# Altium PCB PDB_PCB.PcbDoc (part 1 of 2)
Units mil, origin at the board's own origin, x right, y up, seen from the top; angles counter-clockwise.
Board outline 5500 x 4505 mil, 2 copper layers (Top Layer, Bottom Layer); 322 components, 128 nets, 931 pads, 46 vias.
Unrouted connection lines stored in the file: 604.
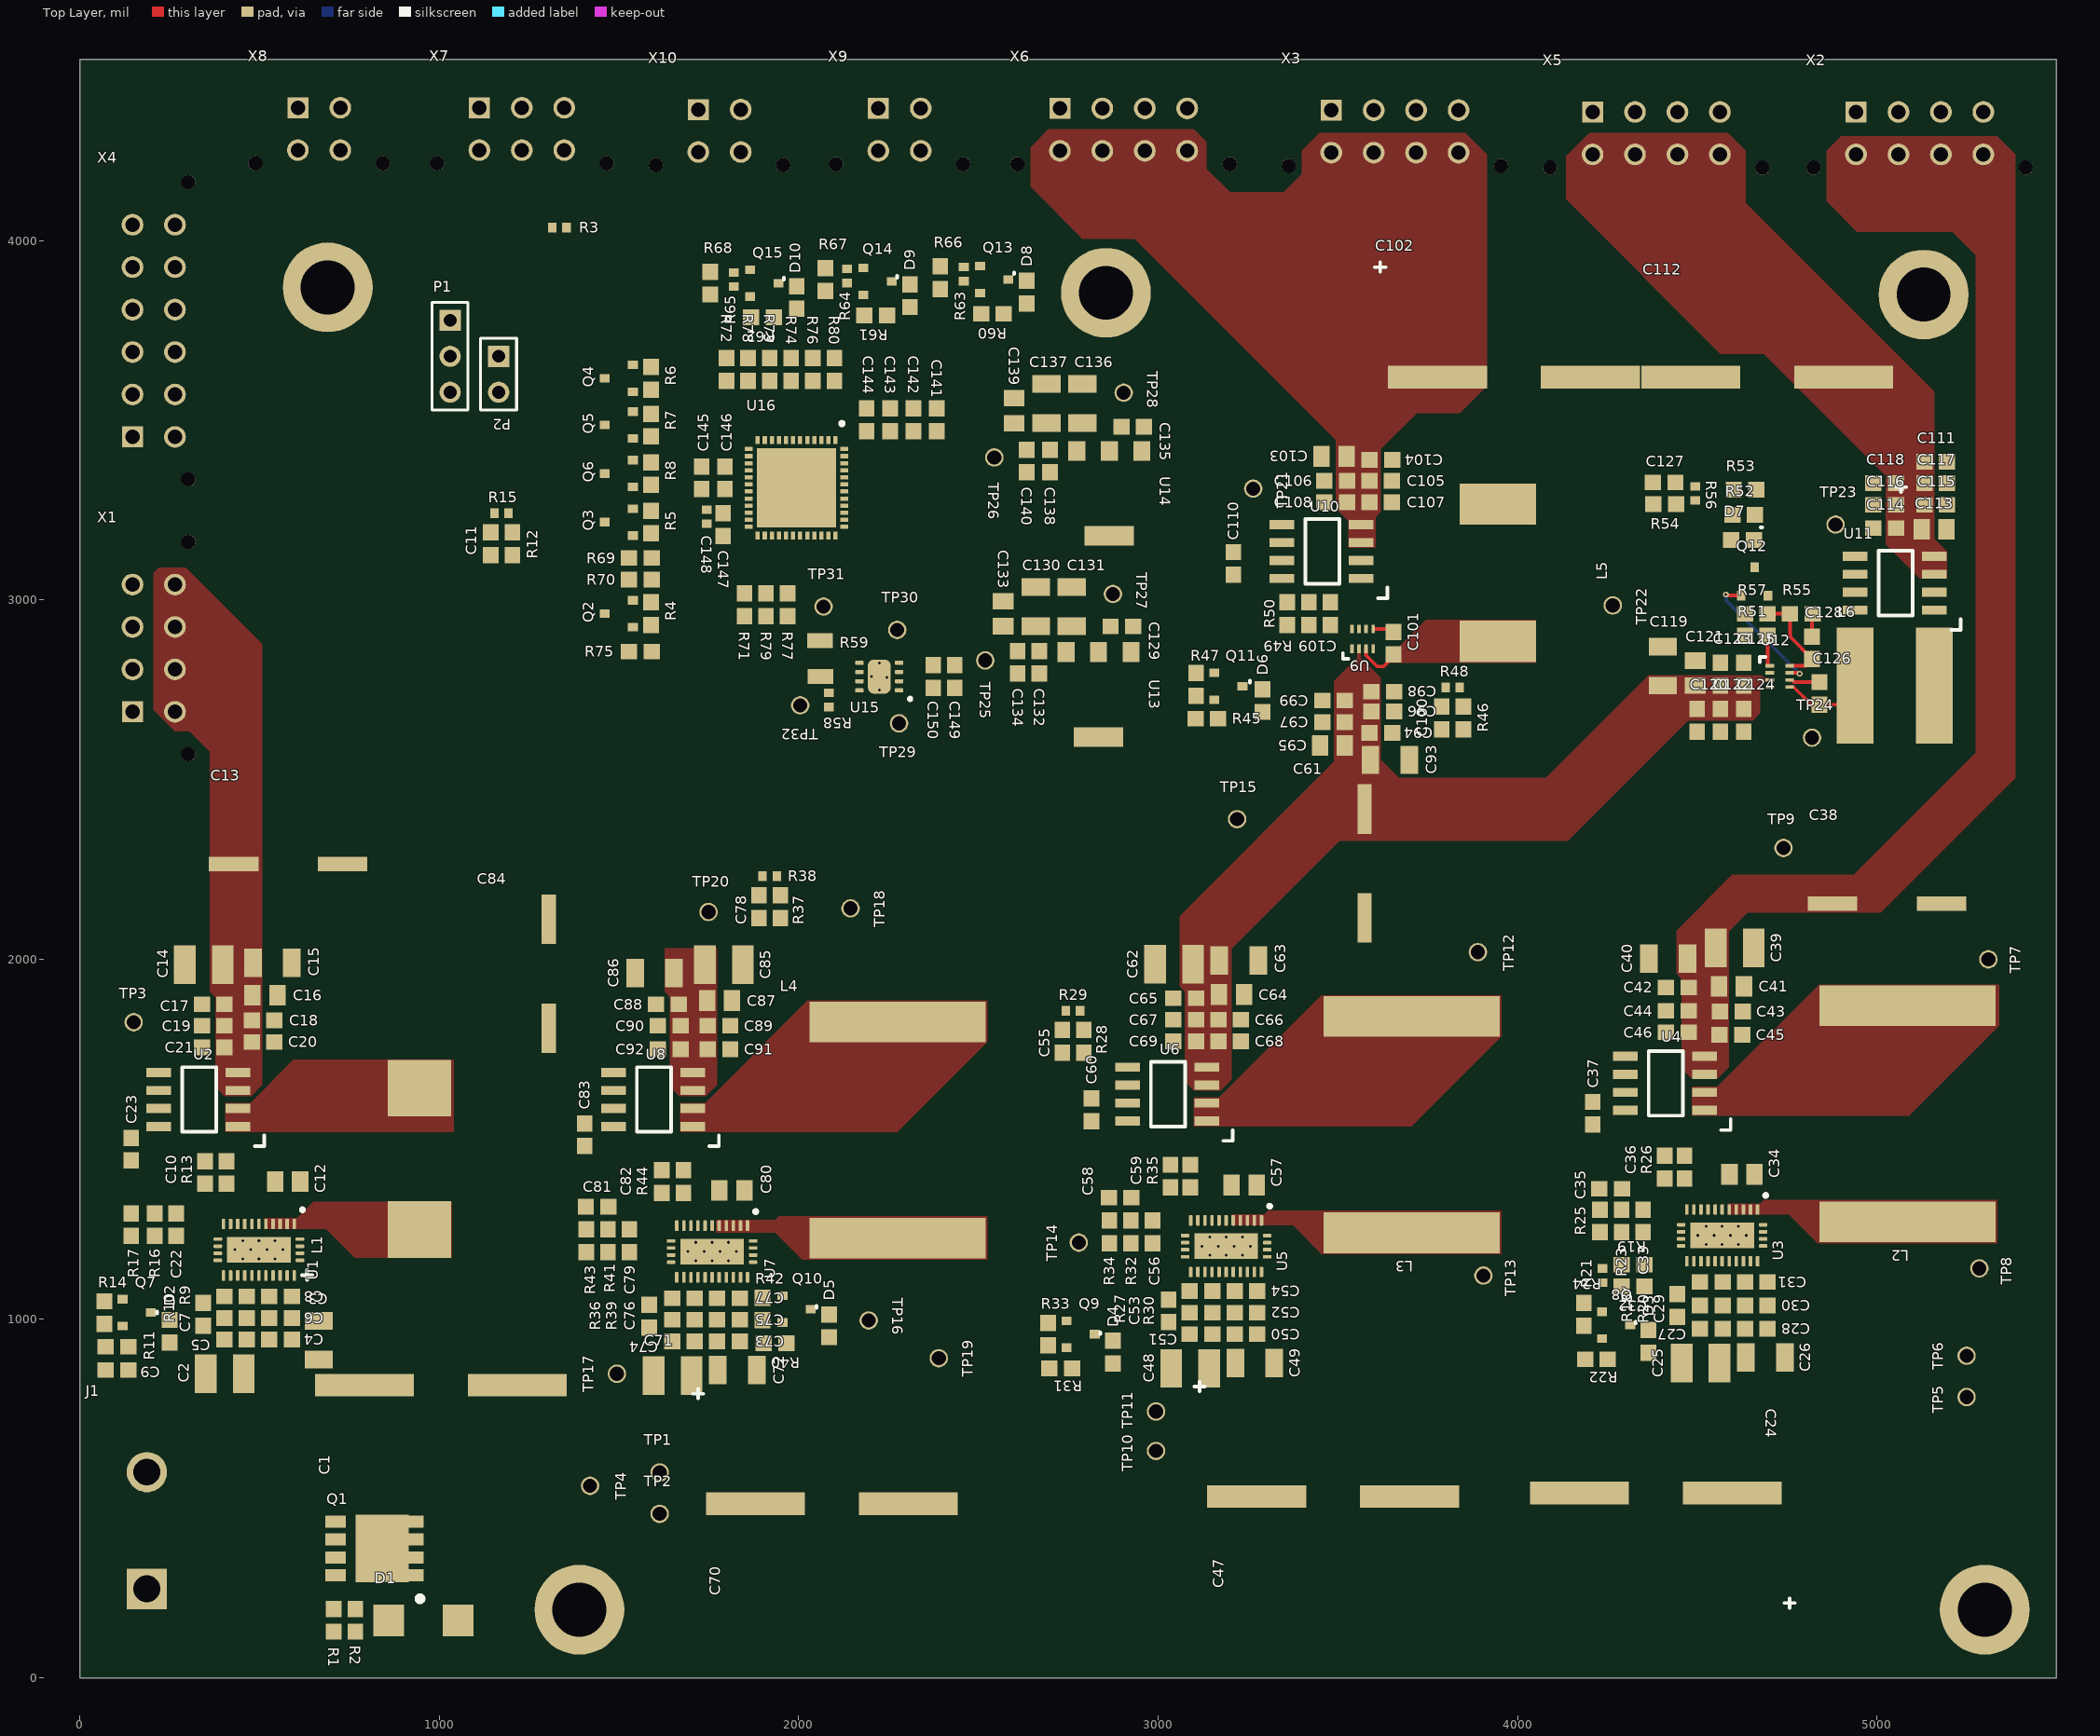
[diagram p0: Top Layer view]
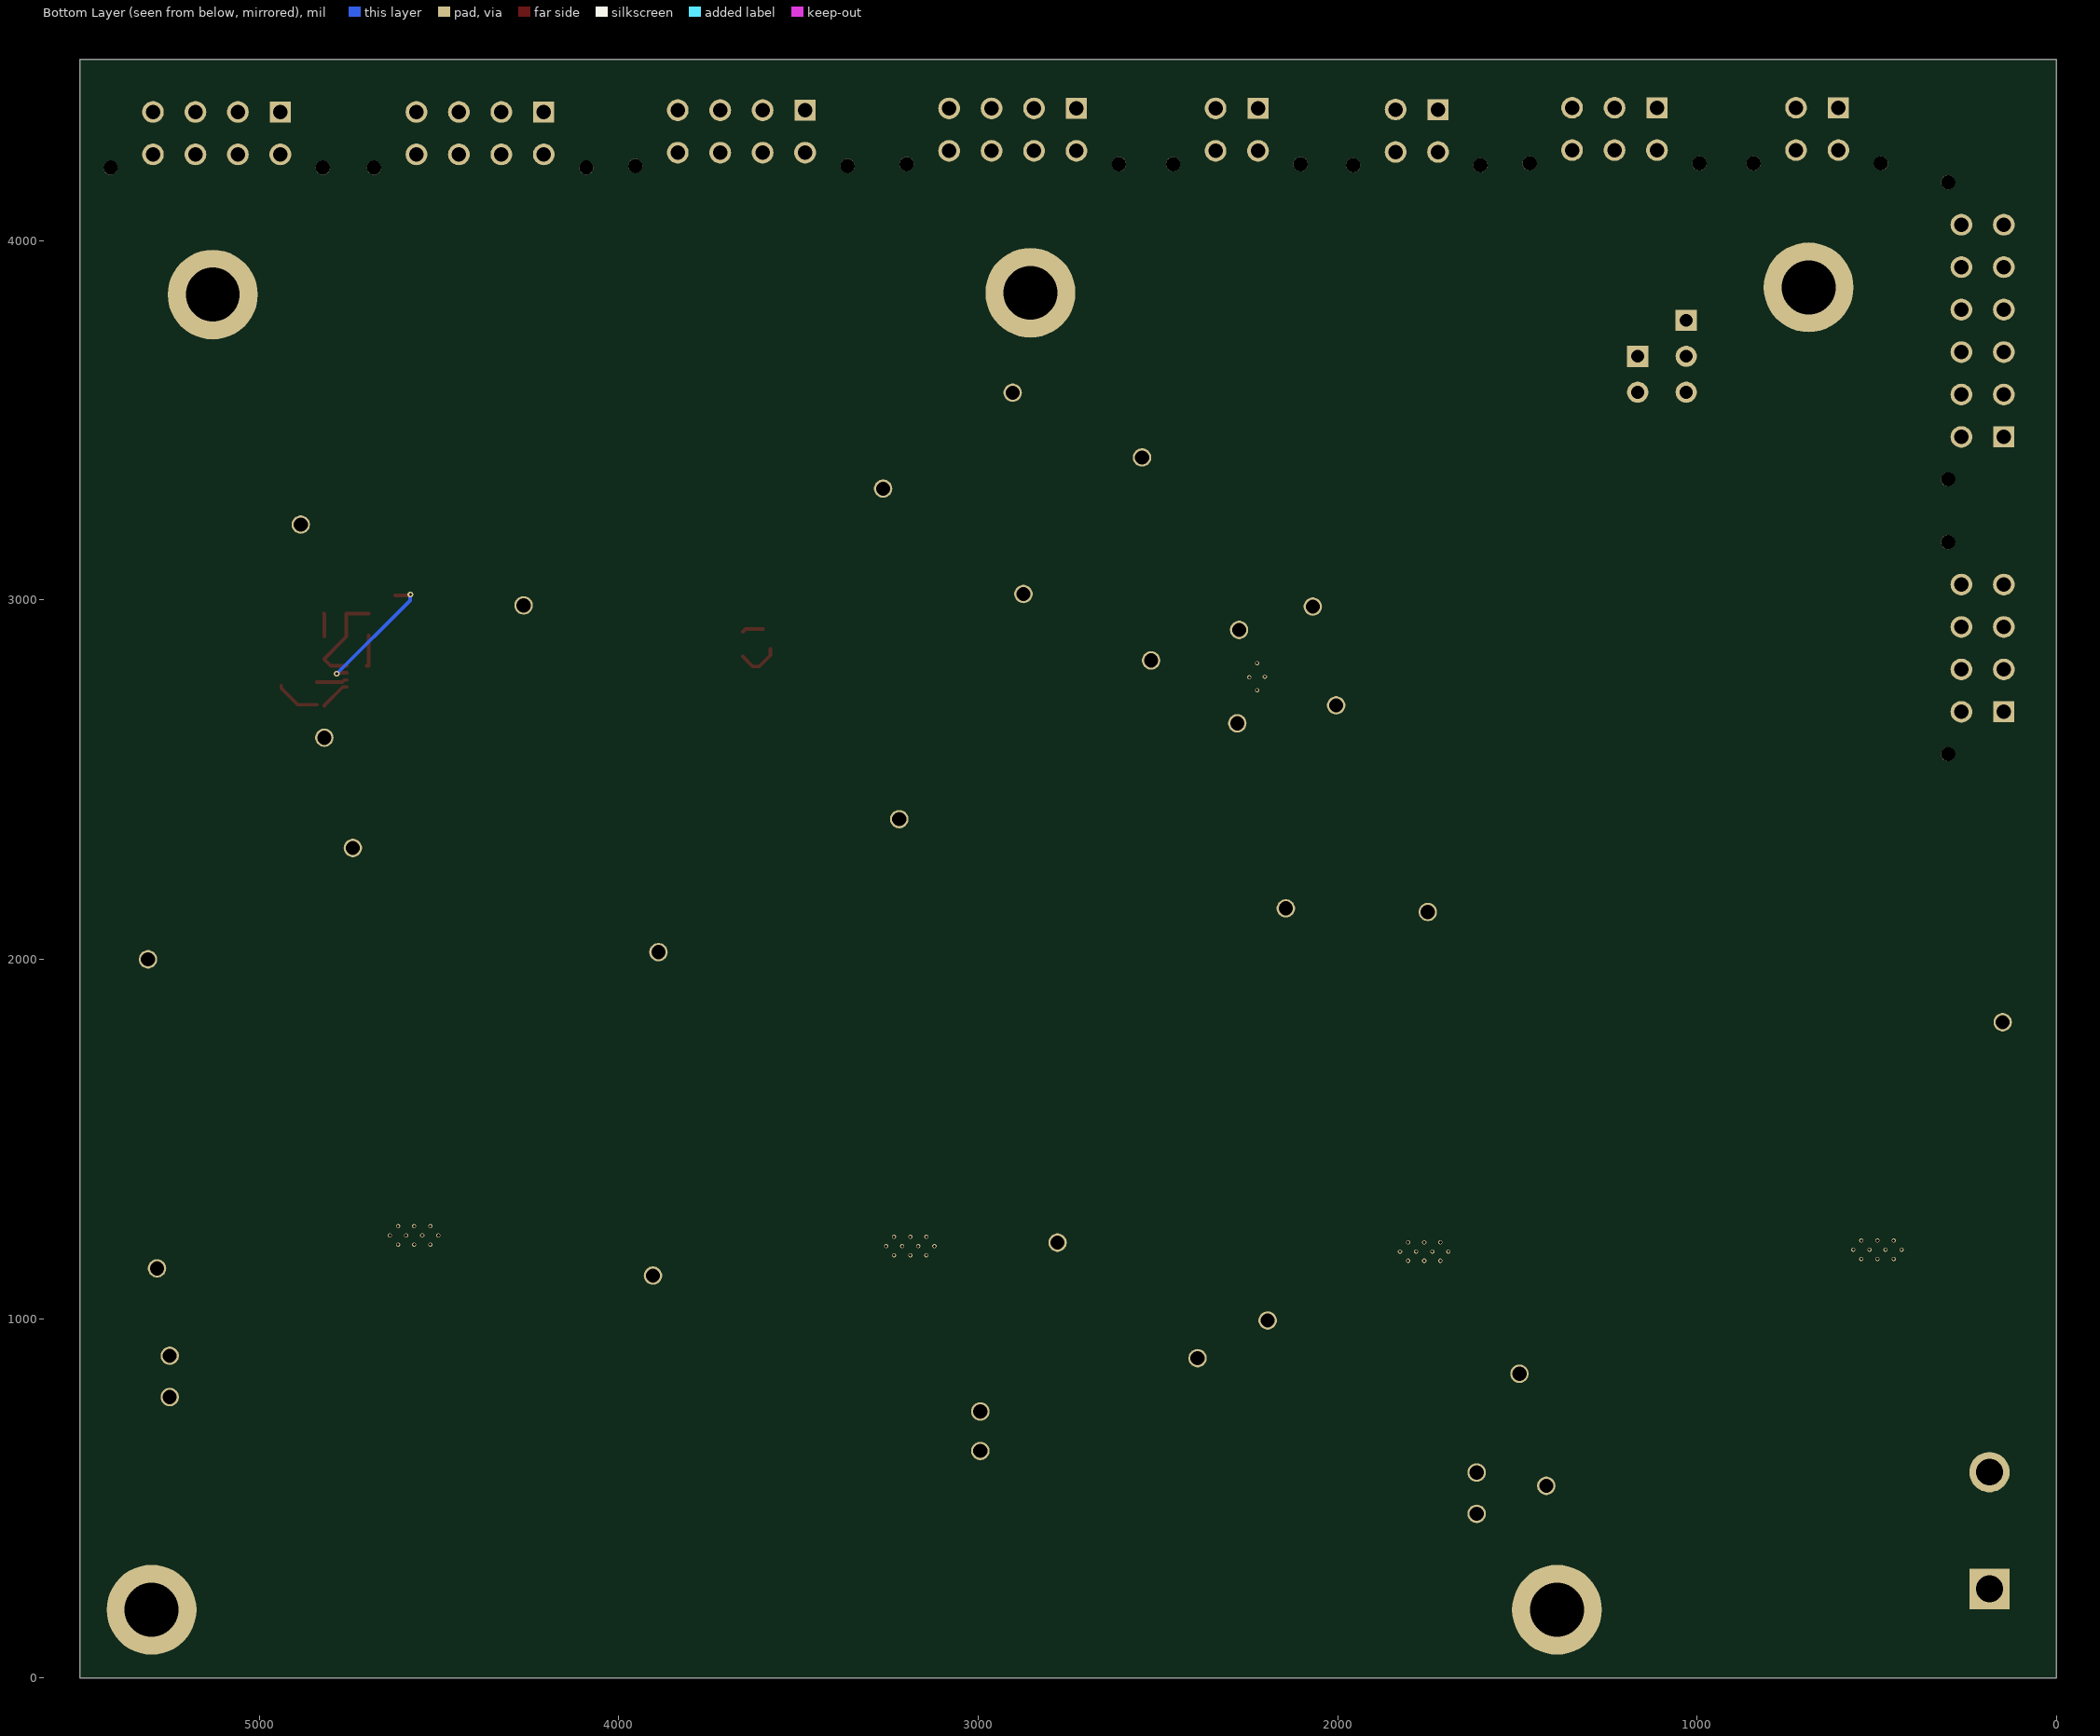
[diagram p1: Bottom Layer view, seen from below]

## Layer stack, top to bottom
Top Solder: solder mask 0.4, Solder Resist, Dk 3.5
Top Layer: signal copper 1.4
Dielectric 1: dielectric 12.6, FR-4, Dk 4.8
Bottom Layer: signal copper 1.4
Bottom Solder: solder mask 0.4, Solder Resist, Dk 3.5

## Board outline
0,0 5500,0 5500,4505 0,4505

## Design rules (kind name [scope] priority, off if disabled: settings)
BoardOutlineClearance [All] p1: gap=7.87 ignorepadtopadclearanceinfootprint=FALSE
Clearance [All] p1: gap=4 ignorepadtopadclearanceinfootprint=FALSE except(5: Arc-Via Track-Via SMDPad-Via THPad-Via Via-Via Via-Fill Via-Poly Via-Region Via-Text; 9.84: Arc-Hole Track-Hole SMDPad-Hole THPad-Hole Via-Hole Fill-Hole Poly-Hole Region-Hole Text-Hole)
ComponentClearance [All] p1: gap=4 collisioncheckmode=3 verticalgap=4 showdistances=TRUE
DiffPairsRouting [All] p1: maxlimit=4 minlimit=4 mostfreqgap=4 toplayer_minwidth=4 toplayer_maxwidth=71497.94 toplayer_prefwidth=4 bottomlayer_minwidth=4 bottomlayer_maxwidth=71497.94 bottomlayer_prefwidth=4 maxuncoupledlength=500
Height [All] p1: minheight=0 maxheight=71497.94 prefheight=500
HoleSize [All] p1: absolutevalues=TRUE maxlimit=248.03 minlimit=7.87 maxpercent=80.000 minpercent=20.000
HoleToHoleClearance [All] p1: gap=9.84 allowstackedmicrovias=FALSE
MinimumAnnularRing [All] p1: minimumring=3
MinimumSolderMaskSliver [All] p1: minsoldermaskwidth=0
PlaneClearance [All] p1: clearance=4
PlaneConnect PlaneConnectPowerPads [InPadClass('PowerPads')] p1: planeconnectstyle=Direct reliefexpansion=20 reliefentries=4 reliefconductorwidth=10 reliefairgap=10
PlaneConnect [All] p2: pad.planeconnectstyle=Relief pad.reliefexpansion=11.81 pad.reliefentries=4 pad.reliefconductorwidth=4 pad.reliefairgap=4 via.planeconnectstyle=Direct via.reliefexpansion=11.81 via.reliefentries=4 via.reliefconductorwidth=5 via.reliefairgap=5
PolygonConnect PolygonConnectPowerPads [All vs (InPadClass('PowerPads'))] p1: connectstyle=Direct reliefconductorwidth=10 reliefentries=4 polygonreliefangle="90 Angle" airgapwidth=10
PolygonConnect [All] p2: connectstyle=Direct reliefconductorwidth=4 reliefentries=4 polygonreliefangle="90 Angle" airgapwidth=4
RoutingVias [All] p1: holewidth=7.87 width=17.72 viastyle="Through Hole" minholewidth=7.87 minwidth=17.72 maxholewidth=248.03 maxwidth=257.87
SilkToSilkClearance [All] p1: silktosilkclearance=0
SilkToSolderMaskClearance [IsPad] p1: minsilkscreentomaskgap=4 clearancetoexposedcopper=TRUE
SolderMaskExpansion [All] p1: expansion=2.95 istentingtop=FALSE
Width [All] p1: maxlimit=71497.94 minlimit=4 preferedwidth=4
20 further rules are at their usual default settings.

## Classes and differential pairs
component class Connectors: D1 J1 Q1 Q2 Q3 Q4 Q5 Q6 R1 R2 R3 R4 R5 R6 R7 R8 X1 X2 X3 X4 X5 X6 X7 X8
component class can-stm32g4: C141 C142 C143 C144 C145 C146 C147 C148 C149 C150 D8 D9 D10 P1 P2 P? Q13 Q14 Q15 R58 R59 R60 R61 R62 R63 R64 R65 R66 R67 R68 R69 R70 R71 R72 R73 R74 R75 R76 R77 R78 R79 R80 TP29 TP30 TP31 TP32 U15 U16 X9 X10
component class 24V_Main: C1 C2 C3 C4 C5 C6 C7 C8 C9 C10 C11 C12 C13 C14 C15 C16 C17 C18 C19 C20 C21 C22 C23 D2 L1 Q7 R9 R10 R11 R12 R13 R14 R15 R16 R17 TP1 TP2 TP3 TP4 U1 U2
component class 12V_Rest: C70 C71 C72 C73 C74 C75 C76 C77 C78 C79 C80 C81 C82 C83 C84 C85 C86 C87 C88 C89 C90 C91 C92 D5 L4 Q10 R36 R37 R38 R39 R40 R41 R42 R43 R44 TP16 TP17 TP18 TP19 TP20 U7 U8
component class 12V_Jetson: C24 C25 C26 C27 C28 C29 C30 C31 C32 C33 C34 C35 C36 C37 C38 C39 C40 C41 C42 C43 C44 C45 C46 D3 L2 Q8 R18 R19 R20 R21 R22 R23 R24 R25 R26 TP5 TP6 TP7 TP8 TP9 U3 U4
component class 12V_For_Bucks: C47 C48 C49 C50 C51 C52 C53 C54 C55 C56 C57 C58 C59 C60 C61 C62 C63 C64 C65 C66 C67 C68 C69 D4 L3 Q9 R27 R28 R29 R30 R31 R32 R33 R34 R35 TP10 TP11 TP12 TP13 TP14 TP15 U5 U6
component class 5V_Main: C93 C94 C95 C96 C97 C98 C99 C100 C101 C103 C104 C105 C106 C107 C108 C109 C110 D6 L5 Q11 R45 R46 R47 R48 R49 R50 TP21 TP22 U9 U10
component class 5V-and-3V3-ldo: C129 C130 C131 C132 C133 C134 C135 C136 C137 C138 C139 C140 TP25 TP26 TP27 TP28 U13 U14
component class 3v3_Main: C111 C112 C113 C114 C115 C116 C117 C118 C119 C120 C121 C122 C123 C124 C125 C126 C127 C128 D7 L6 Q12 R51 R52 R53 R54 R55 R56 R57 TP23 TP24 U11 U12
differential pair CAN: +CAN_P -CAN_N

## Components (designator, comment, footprint, x,y, rotation, side; value= is the part's Value field where it differs from the comment)
C1 "100SEV100M12.5X16" ELEC-100U-0001 1005,815 r90 top
C2 "C3225X7R1N106K250AC" CAP-1210 403.47,846.81 r180 top
C3 "CL31B105KCHNNNE" "CAP-1206 - duplicate" 665,935 r90 top
C4 "CC0603KRX7R0BB104" CAP-0603 558.47,941.81 r0 top
C5 "C1608C0G2A103J080AC" CAP-0603 433.47,941.81 r180 top
C6 "C0603Y102K1RAC7867" CAP-0603 558.47,1001.81 r0 top
C7 "0603N101J101CT" CAP-0603 433.47,1001.81 r180 top
C8 "0603N100J500CT" CAP-0603 558.47,1061.81 r0 top
C9 "UMK107BBJ225KA-T" CAP-0603 103.47,856.81 r0 top
C10 "CC0603KRX7R9BB333" CAP-0603 348.47,1406.81 r90 top
C11 "CC0603KRX7R0BB104" CAP-0603 1143.47,3156.81 r90 top
C12 "KAM21KR72A474KL" CAP-0805 578.47,1381.81 r180 top
C13 "50TZV220M10X10.5" ELEC-220U-0003 580,2265 r270 top
C14 "C3225X7R1N106K250AC" CAP-1210 345,1985 r180 top
C15 "CL31B105KCHNNNE" "CAP-1206 - duplicate" 530.87,1990 r0 top
C16 "KAM21KR72A474KL" CAP-0805 515.35,1900 r0 top
C17 "CC0603KRX7R0BB104" CAP-0603 371.5,1875 r180 top
C18 "C1608C0G2A103J080AC" CAP-0603 510.35,1830 r0 top
C19 "C0603Y102K1RAC7867" CAP-0603 371.5,1815 r180 top
C20 "0603N101J101CT" CAP-0603 510.35,1770 r0 top
C21 "0603N100J500CT" CAP-0603 371.5,1755 r180 top
C22 "885012006087" CAP-0603 268.47,1261.81 r270 top
C23 "CC0603KRX7R0BB104" CAP-0603 143.47,1471.81 r270 top
C24 "100SEV100M12.5X16" ELEC-100U-0001 4385,515 r270 top
C25 "C3225X7R1N106K250AC" CAP-1210 4509.47,876.81 r180 top
C26 "CL31B105KCHNNNE" "CAP-1206 - duplicate" 4684.47,891.81 r0 top
C27 "CC0603KRX7R0BB104" CAP-0603 4539.47,971.81 r180 top
C28 "C1608C0G2A103J080AC" CAP-0603 4664.47,971.81 r0 top
C29 "C0603Y102K1RAC7867" CAP-0603 4539.47,1036.81 r180 top
C30 "0603N101J101CT" CAP-0603 4664.47,1036.81 r0 top
C31 "0603N100J500CT" CAP-0603 4664.47,1101.81 r0 top
C32 "CC0603KRX7R0BB104" CAP-0603 4321.5,1090 r180 top
C33 "885012006087" CAP-0603 4349.47,1271.81 r270 top
C34 "KAM21KR72A474KL" CAP-0805 4624.47,1401.81 r180 top
C35 "UMK107AB7105KA-T" CAP-0603 4259.47,1361.81 r180 top
C36 "CC0603KRX7R9BB333" CAP-0603 4409.47,1421.81 r90 top
C37 "CC0603KRX7R0BB104" CAP-0603 4209.47,1571.81 r90 top
C38 "50TZV220M10X10.5" ELEC-220U-0003 5028.43,2155 r270 top
C39 "C3225X7R1N106K250AC" CAP-1210 4604.47,2031.81 r0 top
C40 "CL31B105KCHNNNE" "CAP-1206 - duplicate" 4424.47,2001.81 r180 top
C41 "KAM21KR72A474KL" CAP-0805 4595.35,1925 r0 top
C42 "CC0603KRX7R0BB104" CAP-0603 4444.47,1921.81 r180 top
C43 "C1608C0G2A103J080AC" CAP-0603 4595,1855 r0 top
C44 "C0603Y102K1RAC7867" CAP-0603 4444.47,1856.81 r180 top
C45 "0603N101J101CT" CAP-0603 4593.5,1790 r0 top
C46 "0603N100J500CT" CAP-0603 4444.47,1796.81 r180 top
C47 "100SEV100M12.5X16" ELEC-100U-0001 3487.4,505 r90 top
C48 "C3225X7R1N106K250AC" CAP-1210 3089.47,861.81 r180 top
C49 "CL31B105KCHNNNE" "CAP-1206 - duplicate" 3264.47,876.81 r0 top
C50 "CC0603KRX7R0BB104" CAP-0603 3244.47,956.81 r0 top
C51 "C1608C0G2A103J080AC" CAP-0603 3119.47,956.81 r180 top
C52 "C0603Y102K1RAC7867" CAP-0603 3244.47,1016.81 r0 top
C53 "0603N101J101CT" CAP-0603 3119.47,1016.81 r180 top
C54 "0603N100J500CT" CAP-0603 3244.47,1076.81 r0 top
C55 "CC0603KRX7R0BB104" CAP-0603 2733.48,1771.81 r90 top
C56 "885012006087" CAP-0603 2984.47,1241.81 r270 top
C57 "KAM21KR72A474KL" CAP-0805 3239.47,1371.81 r180 top
C58 "UMK107AB7105KA-T" CAP-0603 2894.47,1336.81 r180 top
C59 "CC0603KRX7R9BB333" CAP-0603 3034.47,1396.81 r90 top
C60 "CC0603KRX7R0BB104" CAP-0603 2815,1581.5 r90 top
C61 "50TZV220M10X10.5" ELEC-220U-0003 3575,2266.57 r180 top
C62 "C3225X7R1N106K250AC" CAP-1210 3044.47,1986.81 r180 top
C63 "CL31B105KCHNNNE" "CAP-1206 - duplicate" 3219.47,1996.81 r0 top
C64 "KAM21KR72A474KL" CAP-0805 3204.47,1901.81 r0 top
C65 "CC0603KRX7R0BB104" CAP-0603 3074.47,1891.81 r180 top
C66 "C1608C0G2A103J080AC" CAP-0603 3199.47,1831.81 r0 top
C67 "C0603Y102K1RAC7867" CAP-0603 3074.47,1831.81 r180 top
C68 "0603N101J101CT" CAP-0603 3199.47,1771.81 r0 top
C69 "0603N100J500CT" CAP-0603 3074.47,1771.81 r180 top
C70 "100SEV100M12.5X16" ELEC-100U-0001 2092.6,485 r90 top
C71 "C3225X7R1N106K250AC" CAP-1210 1649.47,841.81 r180 top
C72 "CL31B105KCHNNNE" "CAP-1206 - duplicate" 1824.47,856.81 r0 top
C73 "CC0603KRX7R0BB104" CAP-0603 1804.47,936.81 r0 top
C74 "C1608C0G2A103J080AC" CAP-0603 1679.47,936.81 r180 top
C75 "C0603Y102K1RAC7867" CAP-0603 1804.47,996.81 r0 top
C76 "0603N101J101CT" CAP-0603 1679.47,996.81 r180 top
C77 "0603N100J500CT" CAP-0603 1804.47,1056.81 r0 top
C78 "CC0603KRX7R0BB104" CAP-0603 1889.47,2146.81 r90 top
C79 "885012006087" CAP-0603 1529.47,1216.81 r270 top
C80 "KAM21KR72A474KL" CAP-0805 1814.47,1356.81 r180 top
C81 "UMK107AB7105KA-T" CAP-0603 1439.47,1311.81 r180 top
C82 "CC0603KRX7R9BB333" CAP-0603 1619.47,1381.81 r90 top
C83 "CC0603KRX7R0BB104" CAP-0603 1404.47,1511.81 r90 top
C84 "50TZV220M10X10.5" ELEC-220U-0003 1305,1960 r180 top
C85 "C3225X7R1N106K250AC" CAP-1210 1792.2,1985 r0 top
C86 "CL31B105KCHNNNE" "CAP-1206 - duplicate" 1604.47,1961.81 r180 top
C87 "KAM21KR72A474KL" CAP-0805 1780.35,1885 r0 top
C88 "CC0603KRX7R0BB104" CAP-0603 1635,1875 r180 top
C89 "C1608C0G2A103J080AC" CAP-0603 1778.5,1815 r0 top
C90 "C0603Y102K1RAC7867" CAP-0603 1640,1815 r180 top
C91 "0603N101J101CT" CAP-0603 1778.5,1750 r0 top
C92 "0603N100J500CT" CAP-0603 1640,1750 r180 top
C93 "CL31B106KBHNNNE" CAP-1206 3645,2555 r0 top
C94 "UMK107AB7105KA-T" CAP-0603 3620,2630 r0 top
C95 "KAM21KR72A474KL" CAP-0805 3485,2595 r180 top
C96 "C1608C0G2A103J080AC" CAP-0603 3625,2690 r0 top
C97 "CC0603KRX7R0BB104" CAP-0603 3488.5,2660 r180 top
C98 "C0603Y102K1RAC7867" CAP-0603 3625,2745 r0 top
C99 "0603N101J101CT" CAP-0603 3488.5,2720 r180 top
C100 "CC0603KRX7R0BB104" CAP-0603 3789.47,2671.81 r90 top
C101 "CC0603KRX7R0BB104" CAP-0603 3655,2880 r270 top
C102 "100SEV100M12.5X16" ELEC-100U-0001 3990,3620 r90 top
C103 "KAM21KR72A474KL" CAP-0805 3489.65,3400 r180 top
C104 "C0603Y102K1RAC7867" CAP-0603 3620,3390 r0 top
C105 "C1608C0G2A103J080AC" CAP-0603 3619.47,3331.81 r0 top
C106 "CC0603KRX7R0BB104" CAP-0603 3494.47,3331.81 r180 top
C107 "0603N101J101CT" CAP-0603 3619.47,3271.81 r0 top
C108 "7447798111" CAP-0603 3494.47,3271.81 r180 top
C109 "7447798111" CAP-0603 3479.47,2961.81 r90 top
C110 "CC0603KRX7R0BB104" CAP-0603 3209.47,3101.81 r90 top
C111 "CC0603KRX7R0BB104" CAP-0603 5163.5,3385 r180 top
C112 "100SEV100M12.5X16" ELEC-100U-0001 4695,3620 r270 top
C113 "KAM21KR72A474KL" CAP-0805 5159.12,3196.81 r0 top
C114 "C0603Y102K1RAC7867" CAP-0603 5021.5,3200 r180 top
C115 "C1608C0G2A103J080AC" CAP-0603 5163.5,3265 r0 top
C116 "CC0603KRX7R0BB104" CAP-0603 5021.5,3265 r180 top
C117 "0603N101J101CT" CAP-0603 5163.5,3325 r0 top
C118 "7447798111" CAP-0603 5021.5,3325 r180 top
C119 "CL31B106KBHNNNE" CAP-1206 4404.47,2815.94 r90 top
C120 "UMK107AB7105KA-T" CAP-0603 4499.47,2665.31 r270 top
C121 "KAM21KR72A474KL" CAP-0805 4494.47,2796.46 r90 top
C122 "C1608C0G2A103J080AC" CAP-0603 4564.47,2665.31 r270 top
C123 "CC0603KRX7R0BB104" CAP-0603 4564.47,2793.31 r90 top
C124 "C0603Y102K1RAC7867" CAP-0603 4629.47,2665.31 r270 top
C125 "0603N101J101CT" CAP-0603 4629.47,2793.31 r90 top
C126 "CC0603KRX7R0BB104" CAP-0603 4840,2740 r270 top
C127 "CC0603KRX7R0BB104" CAP-0603 4407.98,3326.81 r0 top
C128 "7447798111" CAP-0603 4819.47,2866.81 r270 top
C129 "CGA3E3X7R1H334K080AB" CAP-0603 2899.47,2926.81 r180 top
C130 "CL31B106KBHNNNE" CAP-1206 2659.47,2981.81 r90 top
C131 "CL31B106KBHNNNE" CAP-1206 2759.47,2981.81 r90 top
C132 "UMK107AB7105KA-T" CAP-0603 2669.47,2826.81 r270 top
C133 "KAM21KR72A474KL" CAP-0805 2569.47,2961.81 r270 top
C134 "CC0603KRX7R0BB104" CAP-0603 2609.47,2826.81 r270 top
C135 "CGA3E3X7R1H334K080AB" CAP-0603 2929.47,3481.81 r180 top
C136 "CL31B106KBHNNNE" CAP-1206 2789.47,3546.81 r90 top
C137 "CL31B106KBHNNNE" CAP-1206 2689.47,3546.81 r90 top
C138 "UMK107AB7105KA-T" CAP-0603 2699.47,3386.81 r270 top
C139 "KAM21KR72A474KL" CAP-0805 2599.47,3526.81 r270 top
C140 "CC0603KRX7R0BB104" CAP-0603 2634.47,3386.81 r270 top
C141 "TMK107BBJ475KA-T" CAP-0603 2384.47,3501.81 r90 top
C142 "CC0603KRX7R0BB104" CAP-0603 2319.47,3501.81 r90 top
C143 "CC0603KRX7R0BB104" CAP-0603 2254.47,3501.81 r90 top
C144 "CC0603KRX7R0BB104" CAP-0603 2189.47,3501.81 r90 top
C145 "UMK107AB7105KA-T" CAP-0603 1730,3340 r90 top
C146 "CC0603KRX7R0BB104" CAP-0603 1795,3340 r90 top
C147 "UMK107AB7105KA-T" CAP-0603 1790,3210 r270 top
C148 "CC0402KRX7R0BB103" CAP-0402 1744.47,3231.81 r270 top
C149 "TMK107BBJ475KA-T" CAP-0603 2434.47,2786.81 r270 top
C150 "CC0603KRX7R0BB104" CAP-0603 2374.47,2786.81 r270 top
D1 "SMBJE43CAH" "DO-214AA (SMBJ)" 955,160 r0 top
D2 "150060AS75000" LED-0603 250,965 r90 top
D3 "150060AS75000" LED-0603 4364.47,936.81 r90 top
D4 "150060AS75000" LED-0603 2874.47,906.81 r90 top
D5 "150060AS75000" LED-0603 2085,980 r90 top
D6 "150060AS75000" LED-0603 3290.63,2720 r90 top
D7 "150060AS75000" LED-0603 4625.97,3166.81 r0 top
D8 "150060AS75000" LED-0603 2634.47,3856.81 r90 top
D9 "150060AS75000" LED-0603 2309.47,3846.81 r90 top
D10 "150060AS75000" LED-0603 1994.47,3841.81 r90 top
J1 "1546927-2" CONN-1546927-2 186.81,410.53 r180 top
L1 "SRP1270-100M" PWRIND-10U-0002 945,1445 r90 top
L2 "IHLP6767GZER8R2M01" PWRIND-8.2U-0002 5085,1570 r90 top
L3 "IHLP6767GZER8R2M01" PWRIND-8.2U-0002 3705,1540 r90 top
L4 "IHLP6767GZER8R2M01" PWRIND-8.2U-0002 2275,1525 r90 top
L5 "SRR1240-3R3Y" PWRIND-3.3U-0003 3945,3075.94 r90 top
L6 "SRN8040-1R0Y" PWRIND-6.8U-0001 5049.47,2761.81 r0 top
P1 "Header 3" HDR1X3 1030.53,3778.19 r270 top
P2 "Header 2" HDR1X2 1165.53,3678.19 r270 top
Q1 "TPH7R006PL,L1Q" NMOS-8PowerVDFN 931.81,285.53 r90 top
Q2 "T2N7002AK,LM" NMOS-SOT23-3 1499.47,2961.81 r90 top
Q3 "T2N7002AK,LM" NMOS-SOT23-3 1499.47,3216.81 r90 top
Q4 "T2N7002AK,LM" NMOS-SOT23-3 1499.47,3616.81 r90 top
Q5 "T2N7002AK,LM" NMOS-SOT23-3 1499.47,3486.81 r90 top
Q6 "T2N7002AK,LM" NMOS-SOT23-3 1499.47,3351.81 r90 top
Q7 "T2N7002AK,LM" NMOS-SOT23-3 158.47,1016.81 r270 top
Q8 "T2N7002AK,LM" NMOS-SOT23-3 4274.47,981.81 r270 top
Q9 "T2N7002AK,LM" NMOS-SOT23-3 2784.47,956.81 r270 top
Q10 "T2N7002AK,LM" NMOS-SOT23-3 1994.47,1026.81 r270 top
Q11 "T2N7002AK,LM" NMOS-SOT23-3 3195.63,2760 r270 top
Q12 "T2N7002AK,LM" NMOS-SOT23-3 4659.47,3051.81 r0 top
Q13 "T2N7002AK,LM" NMOS-SOT23-3 2544.47,3891.81 r270 top
Q14 "T2N7002AK,LM" NMOS-SOT23-3 2219.47,3886.81 r270 top
Q15 "T2N7002AK,LM" NMOS-SOT23-3 1904.47,3881.81 r270 top
R1 "ERJ-3EKF2003V" RES-0603 706.81,160.53 r90 top
R2 "RC0603FR-07100KL" RES-0603 766.81,160.53 r90 top
R3 "RC0402FR-0710KL" RES-0402 1334.47,4036.81 r180 top
R4 "RMCF0603ZT0R00" RES-0603 1589.47,2961.81 r270 top
R5 "RMCF0603ZT0R00" RES-0603 1589.47,3216.81 r270 top
R6 "RMCF0603ZT0R00" RES-0603 1589.47,3616.81 r270 top
R7 "RMCF0603ZT0R00" RES-0603 1589.47,3486.81 r270 top
R8 "RMCF0603ZT0R00" RES-0603 1589.47,3351.81 r270 top
R9 "RC0603FR-072M15L" RES-0603 433.47,1061.81 r0 top
R10 "RC0603FR-07100KL" RES-0603 343.47,1011.81 r270 top
R11 "AC0603FR-10100RL" RES-0603 103.47,921.81 r0 top
R12 "RC0603FR-0710KP" RES-0603 1203.47,3156.81 r90 top
R13 "RC0603FR-0776K8L" RES-0603 408.47,1406.81 r90 top
R14 "RC0603FR-0710KP" RES-0603 68.47,1016.81 r270 top
R15 "TMP6431DECR" RES-0402 1173.47,3241.81 r0 top
R16 "RC0603FR-07100KL" RES-0603 208.47,1261.81 r270 top
R17 "RC0603FR-074K32L" RES-0603 143.47,1261.81 r90 top
R18 "RC0603FR-072M15L" RES-0603 4539.47,1101.81 r0 top
R19 "RC0603FR-0710KP" RES-0603 4321.5,1150 r180 top
R20 "RC0603FR-07100KL" RES-0603 4444.47,1036.81 r270 top
R21 "TMP6431DECR" RES-0402 4236.5,1120 r90 top
R22 "AC0603FR-10100RL" RES-0603 4219.47,886.81 r0 top
R23 "RC0603FR-07100KL" RES-0603 4289.47,1271.81 r270 top
R24 "RC0603FR-0710KP" RES-0603 4184.47,1011.81 r270 top
R25 "RC0603FR-079K09L" RES-0603 4229.47,1271.81 r90 top
R26 "RC0603FR-0776K8L" RES-0603 4464.47,1421.81 r90 top
R27 "RC0603FR-072M15L" RES-0603 3119.47,1076.81 r0 top
R28 "RC0603FR-0710KP" RES-0603 2793.48,1771.81 r90 top
R29 "TMP6431DECR" RES-0402 2763.48,1856.81 r0 top
R30 "RC0603FR-07100KL" RES-0603 3029.47,1021.81 r270 top
R31 "AC0603FR-10100RL" RES-0603 2729.47,861.81 r0 top
R32 "RC0603FR-07100KL" RES-0603 2924.47,1241.81 r270 top
R33 "RC0603FR-0710KP" RES-0603 2694.47,956.81 r270 top
R34 "RC0603FR-079K09L" RES-0603 2864.47,1241.81 r90 top
R35 "RC0603FR-0776K8L" RES-0603 3089.47,1396.81 r90 top
R36 "RC0603FR-072M15L" RES-0603 1679.47,1056.81 r0 top
R37 "RC0603FR-0710KP" RES-0603 1949.47,2146.81 r90 top
R38 "TMP6431DECR" RES-0402 1919.47,2231.81 r0 top
R39 "RC0603FR-07100KL" RES-0603 1584.47,1006.81 r270 top
R40 "AC0603FR-10100RL" RES-0603 1934.47,931.81 r0 top
R41 "RC0603FR-07100KL" RES-0603 1469.47,1216.81 r270 top
R42 "RC0603FR-0710KP" RES-0603 1899.47,1026.81 r270 top
R43 "RC0603FR-079K09L" RES-0603 1409.47,1216.81 r90 top
R44 "RC0603FR-0776K8L" RES-0603 1679.47,1381.81 r90 top
R45 "CRGCQ0603J220R" RES-0603 3135.63,2670 r0 top
R46 "RC0603FR-0710KP" RES-0603 3849.47,2671.81 r90 top
R47 "RC0603FR-0710KP" RES-0603 3105.63,2765 r270 top
R48 "TMP6431DECR" RES-0402 3819.47,2756.81 r0 top
R49 "RC0603FR-0773K2L" RES-0603 3419.47,2961.81 r270 top
R50 "RC0603FR-0710KP" RES-0603 3359.47,2961.81 r90 top
R51 "RC0603FR-079K09L" RES-0603 4664.47,2901.81 r180 top
R52 "AC0603FR-10100RL" RES-0603 4629.47,3236.81 r180 top
R53 "AF0603FR-074K7L" RES-0603 4632.98,3306.81 r180 top
R54 "RC0603FR-0710KP" RES-0603 4409.47,3266.81 r0 top
R55 "RC0603FR-0730K9L" RES-0603 4789.47,2961.81 r180 top
R56 "TMP6431DECR" RES-0402 4494.47,3296.81 r270 top
R57 "RC0603FR-0710KP" RES-0603 4664.47,2961.81 r180 top
R58 "RC0402FR-074K7P" RES-0402 2084.47,2721.81 r90 top
R59 "CRGH1206F120R" RES-1206 2059.47,2836.81 r270 top
R60 "AC0603FR-10100RL" RES-0603 2539.47,3796.81 r0 top
R61 "AC0603FR-10100RL" RES-0603 2214.47,3791.81 r0 top
R62 "AC0603FR-10100RL" RES-0603 1899.47,3786.81 r0 top
R63 "ERJ2RKF33R0X" RES-0402 2459.47,3906.81 r90 top
R64 "ERJ2RKF33R0X" RES-0402 2134.47,3901.81 r90 top
R65 "ERJ2RKF33R0X" RES-0402 1819.47,3891.81 r90 top
R66 "RC0603FR-0710KP" RES-0603 2394.47,3896.81 r270 top
R67 "RC0603FR-0710KP" RES-0603 2074.47,3891.81 r270 top
R68 "RC0603FR-0710KP" RES-0603 1754.47,3881.81 r270 top
R69 "RMCF0603ZT0R00" RES-0603 1559.47,3116.81 r180 top
R70 "RMCF0603ZT0R00" RES-0603 1559.47,3056.81 r180 top
R71 "RMCF0603ZT0R00" RES-0603 1849.47,2986.81 r270 top
R72 "RMCF0603ZT0R00" RES-0603 1799.47,3641.81 r270 top
R73 "RMCF0603ZT0R00" RES-0603 1919.47,3641.81 r270 top
R74 "RMCF0603ZT0R00" RES-0603 1979.47,3641.81 r270 top
R75 "RMCF0603ZT0R00" RES-0603 1559.47,2856.81 r180 top
R76 "RMCF0603ZT0R00" RES-0603 2039.47,3641.81 r90 top
R77 "RMCF0603ZT0R00" RES-0603 1969.47,2986.81 r270 top
R78 "RMCF0603ZT0R00" RES-0603 1859.47,3641.81 r90 top
R79 "RMCF0603ZT0R00" RES-0603 1909.47,2986.81 r270 top
R80 "RMCF0603ZT0R00" RES-0603 2099.47,3641.81 r90 top
TP1 "5003" TEST-POINT-0001 1613.47,571.81 r90 top
TP2 "5003" TEST-POINT-0001 1613.47,456.81 r90 top
TP3 "5003" TEST-POINT-0001 150,1825 r90 top
TP4 "5003" TEST-POINT-0001 1420,535 r90 top
TP5 "5003" TEST-POINT-0001 5249.47,781.81 r90 top
TP6 "5003" TEST-POINT-0001 5249.47,896.81 r90 top
TP7 "5003" TEST-POINT-0001 5310,2000 r90 top
TP8 "5003" TEST-POINT-0001 5285,1140 r90 top
TP9 "5003" TEST-POINT-0001 4740,2310 r0 top
TP10 "5003" TEST-POINT-0001 2994.47,631.81 r180 top
TP11 "5003" TEST-POINT-0001 2994.47,741.81 r180 top
TP12 "5003" TEST-POINT-0001 3890,2020 r180 top
TP13 "5003" TEST-POINT-0001 3905,1120 r180 top
TP14 "5003" TEST-POINT-0001 2779.47,1211.81 r180 top
TP15 "5003" TEST-POINT-0001 3220,2390 r180 top
TP16 "5003" TEST-POINT-0001 2195,995 r0 top
TP17 "5003" TEST-POINT-0001 1494.47,846.81 r180 top
TP18 "5003" TEST-POINT-0001 2144.47,2141.81 r180 top
TP19 "5003" TEST-POINT-0001 2390,890 r180 top
TP20 "5003" TEST-POINT-0001 1749.47,2131.81 r90 top
TP21 "5003" TEST-POINT-0001 3265,3310 r180 top
TP22 "5003" TEST-POINT-0001 4265,2985 r180 top
TP23 "5003" TEST-POINT-0001 4885,3210 r90 top
TP24 "5003" TEST-POINT-0001 4819.47,2616.81 r90 top
TP25 "5003" TEST-POINT-0001 2519.47,2831.81 r0 top
TP26 "5003" TEST-POINT-0001 2544.47,3396.81 r0 top
TP27 "5003" TEST-POINT-0001 2874.47,3016.81 r0 top
TP28 "5003" TEST-POINT-0001 2904.47,3576.81 r0 top
TP29 "5003" TEST-POINT-0001 2279.47,2656.81 r90 top
TP30 "5003" TEST-POINT-0001 2274.47,2916.81 r90 top
TP31 "5003" TEST-POINT-0001 2069.47,2981.81 r0 top
TP32 "5003" TEST-POINT-0001 2004.47,2706.81 r270 top
U1 "LM76005RNPR" IC-30-WQFN(6x4) 498.47,1191.81 r270 top
U2 "TMCS1108A4BQDR" IC-CURRENT-0001 330,1610 r90 top
U3 "LM76005RNPR" IC-30-WQFN(6x4) 4569.47,1231.81 r270 top
U4 "TMCS1108A4BQDR" IC-CURRENT-0001 4410,1655 r90 top
U5 "LM76005RNPR" IC-30-WQFN(6x4) 3189.47,1201.81 r270 top
U6 "TMCS1108A4BQDR" IC-CURRENT-0001 3025,1625 r90 top
U7 "LM76005RNPR" IC-30-WQFN(6x4) 1759.47,1186.81 r270 top
U8 "TMCS1108A4BQDR" IC-CURRENT-0001 1595,1610 r90 top
U9 "TPS563212DRLR" IC-SOT583 3569.47,2891.81 r0 top
U10 "TMCS1108A4BQDR" IC-CURRENT-0001 3454.76,3135 r90 top
U11 "TMCS1108A4BQDR" IC-CURRENT-0001 5049.47,3046.81 r90 top
U12 "TPS62933ODRLR" IC-SOT583 4729.47,2786.81 r270 top
U13 "UA78M05IDCYR" IC-SOT-223-4 2834.47,2736.81 r270 top
U14 "UA78M33CDCYR" IC-SOT-223-4 2864.47,3296.81 r270 top
U15 "TCAN1042HGDRBTQ1" IC-8-VSON 2224.47,2786.81 r180 top
U16 "STM32G431CBU6" MCU-UFQFPN48 1994.47,3311.81 r270 top
X1 "Molex 43045-0812" 43045-0812 146.89,2865.94 r270 top
X2 "Molex 43045-0812" 43045-0812 5119.06,4358.11 r180 top
X3 "Molex 43045-0812" 43045-0812 3659.06,4363.11 r180 top
X4 "Molex - Micro-Fit 3.0 Series connector,  3.00mm (0.118\") pitch header, 12 positions." 43045-1212 146.89,3749.06 r270 top
X5 "Molex 43045-0812" 43045-0812 4385.94,4358.11 r180 top
X6 "Molex 43045-0812" 43045-0812 2904.06,4368.11 r180 top
X7 "Molex 43045-0612" 43045-0612 1230,4370 r180 top
X8 "Molex 43045-0412" 43045-0412 665.94,4370 r180 top
X9 "Molex 43045-0412" 43045-0412 2280.94,4368.11 r180 top
X10 "Molex 43045-0412" 43045-0412 1780,4365 r180 top

## Footprints (in the part's own frame and the unit in brackets; to place one, negate y for a bottom-side part, rotate by r counter-clockwise, add the part's x,y. Pads: shape width x height; smd on the part's side, far side on the other; paste and mask are expansions set on the pad)
43045-0412 [mm]
  round 1.02 hole 1.02 unplated: 1(-4.5,3.94) 1(4.5,3.94)
  rect 1.482x1.482 / inner rect 1.524x1.524 / far side rect 1.482x1.482 hole 1.02: P$1(1.5,0)
  round 1.53 / inner round 1.524 / far side round 1.53 hole 1.02: P$2(-1.5,0) P$3(1.5,3) P$4(-1.5,3)
  body extent -5.07,-2.45 5.08,6.32, height 10.03
43045-0612 [mm]
  round 1.02 hole 1.02 unplated: 1(-6,3.94) 1(6,3.94)
  rect 1.482x1.482 / inner rect 1.524x1.524 / far side rect 1.482x1.482 hole 1.02: P$1(3,0)
  round 1.53 / inner round 1.524 / far side round 1.53 hole 1.02: P$2(0,0) P$3(-3,0) P$4(3,3) P$5(0,3) P$6(-3,3)
  body extent -6.57,-2.45 6.58,6.32, height 10.03
43045-0812 [mm]
  round 1.02 hole 1.02 unplated: 1(-7.5,3.94) 1(7.5,3.94)
  rect 1.482x1.482 / inner rect 1.524x1.524 / far side rect 1.482x1.482 hole 1.02: P$1(4.5,0)
  round 1.53 / inner round 1.524 / far side round 1.53 hole 1.02: P$2(1.5,0) P$3(-1.5,0) P$4(-4.5,0) P$5(4.5,3) P$6(1.5,3) P$7(-1.5,3) P$8(-4.5,3)
  body extent -8.07,-2.45 8.08,6.32, height 10.03
43045-1212 [mm]
  round 1.02 hole 1.02 unplated: 1(-10.5,3.94) 1(10.5,3.94)
  rect 1.482x1.482 / inner rect 1.524x1.524 / far side rect 1.482x1.482 hole 1.02: P$1(7.5,0)
  round 1.53 / inner round 1.524 / far side round 1.53 hole 1.02: P$2(4.5,0) P$3(1.5,0) P$4(-1.5,0) P$5(-4.5,0) P$6(-7.5,0) P$7(7.5,3) P$8(4.5,3) P$9(1.5,3) P$10(-1.5,3) P$11(-4.5,3) P$12(-7.5,3)
CAP-0402 [mm]
  rect 0.6x0.7 smd: 1(-0.5,0) 2(0.5,0)
  body extent -0.5,-0.22 0.5,0.23, height 0.5
CAP-0603 [mm]
  rect 1.15x1.1 smd: 1(-0.8,0) 2(0.8,0)
  body extent -0.8,-0.45 0.8,0.45, height 0.8
CAP-0805 [mm]
  rect 1.16x1.47 smd: 1(-0.88,0) 2(0.88,0)
  body extent -1,-0.63 1,0.63, height 0.94
CAP-1206 [mm]
  rect 1.25x2 smd: 1(-1.375,0) 2(1.375,0)
  body extent -1.6,-0.8 1.6,0.8, height 1.5
"CAP-1206 - duplicate" [mm]
  rect 1.25x2 smd: 1(-1.248,0) 2(1.502,0)
  body extent -1.47,-0.8 1.73,0.8, height 1.5
CAP-1210 [mm]
  rect 1.53x2.72 smd: 1(-1.341,0) 2(1.341,0)
  body extent -1.6,-1.25 1.6,1.25, height 2.7
CONN-1546927-2 [mm]
  rect 2.85x2.85 hole 1.9: 1(0,4.127)
  round 2.85 hole 1.9: 2(0,-4.127)
  body extent -11.57,-8.85 4.49,8.85, height 14.99
"DO-214AA (SMBJ)" [mm]
  rect 2.16x2.26 smd: 1(-2.416,0) 2(2.484,0)
  body extent -2.72,-1.95 2.78,1.95, height 2.45
ELEC-100U-0001 [mm]
  rect 1.6x7 smd: 1(0,5.4) 2(0,-5.4)
  silkscreen extent 7.45,9.08 8.13,9.82, body extent -6.6,-7.15 6.6,7.15, height 16.56
ELEC-220U-0003 [mm]
  rect 1x3.5 smd: 1(0,-3.85) 2(0,3.85)
  body extent -5.25,-5.45 5.25,5.45, height 10.54
HDR1X2 [mm] "Connector; Header; 2 Position"
  rect 1.5x1.5 hole 0.9: 1(0,0)
  round 1.5 hole 0.9: 2(2.54,0)
  silkscreen extent -1.27,-1.27 3.81,1.27
HDR1X3 [mm] "Connector; Header; 3 Position"
  rect 1.5x1.5 hole 0.9: 1(0,0)
  round 1.5 hole 0.9: 2(2.54,0) 3(5.08,0)
  silkscreen extent -1.27,-1.27 6.35,1.27
IC-8-VSON [mm]
  rrect50% 0.6x0.3 smd mask+0.07: 1(-1.4,0.975) 2(-1.4,0.325) 3(-1.4,-0.325) 4(-1.4,-0.975) 5(1.4,-0.975) 6(1.4,-0.325) 7(1.4,0.325) 8(1.4,0.975)
  rrect50% 1.6x2.4 smd: 9(0,0)
  silkscreen extent -2.27,1.48 -2.09,1.67, body extent -1.5,-1.5 1.5,1.5, height 1
IC-30-WQFN(6x4) [mm] "30 pin WQFN with exposed pad"
  rrect50% 0.75x0.25 smd mask+0.07: 1(-1.825,2.5) 2(-1.825,2) 3(-1.825,1.5) 4(-1.825,1) 5(-1.825,0.5) 6(-1.825,0) 7(-1.825,-0.5) 8(-1.825,-1) 9(-1.825,-1.5) 10(-1.825,-2) 11(-1.825,-2.5) 16(1.825,-2.5) 17(1.825,-2) 18(1.825,-1.5) 19(1.825,-1) 20(1.825,-0.5) 21(1.825,0) 22(1.825,0.5) 23(1.825,1) 24(1.825,1.5) 25(1.825,2) 26(1.825,2.5)
  rrect50% 0.25x0.6 smd mask+0.07: 12(-0.75,-2.9) 13(-0.25,-2.9) 14(0.25,-2.9) 15(0.75,-2.9) 27(0.75,2.9) 28(0.25,2.9) 29(-0.25,2.9) 30(-0.75,2.9)
  rect 1.8x4.5 smd: 31(0,0)
  silkscreen extent -2.94,2.96 -2.71,3.19, body extent -2,-3 2,3, height 0.8
IC-CURRENT-0001 [mm]
  rect 0.65x1.75 smd: 1(-1.905,-2.8) 2(-0.635,-2.8) 3(0.635,-2.8) 4(1.905,-2.8) 5(1.905,2.8) 6(0.635,2.8) 7(-0.635,2.8) 8(-1.905,2.8)
  silkscreen extent -3.3,-4.65 2.29,1.14, body extent -2.45,-3.04 2.45,2.99, height 1.63
IC-SOT583 [mm]
  rect 0.25x0.6 smd: 1(-0.762,-0.7) 2(-0.262,-0.7) 3(0.238,-0.7) 4(0.738,-0.7) 5(0.738,0.7) 6(0.238,0.7) 7(-0.262,0.7) 8(-0.762,0.7)
  silkscreen extent -1.4,-1.4 -1.02,-1.02, body extent -1.11,-0.85 1.11,0.85, height 0.56
IC-SOT-223-4 [mm]
  rect 1.4x1.2 smd mask+0.07: 1(-3,2.3) 2(-3,0) 3(-3,-2.3)
  rect 1.4x3.5 smd: 2(3,0)
  body extent -3.5,-3.25 3.5,3.25, height 1.68
LED-0603 [mm]
  rect 1.15x1.1 smd: 1(-0.8,0) 2(0.8,0)
  silkscreen extent 1.27,0.89 1.4,0.89, body extent -0.8,-0.3 0.8,0.3, height 1
MCU-UFQFPN48 [mm] "STM32G431CBU6"
  rect 0.55x0.3 smd mask+0.07: 1(-3.375,2.75) 2(-3.375,2.25) 3(-3.375,1.75) 4(-3.375,1.25) 5(-3.375,0.75) 6(-3.375,0.25) 7(-3.375,-0.25) 8(-3.375,-0.75) 9(-3.375,-1.25) 10(-3.375,-1.75) 11(-3.375,-2.25) 12(-3.375,-2.75) 25(3.375,-2.75) 26(3.375,-2.25) 27(3.375,-1.75) 28(3.375,-1.25) 29(3.375,-0.75) 30(3.375,-0.25) 31(3.375,0.25) 32(3.375,0.75) 33(3.375,1.25) 34(3.375,1.75) 35(3.375,2.25) 36(3.375,2.75)
  rect 0.3x0.55 smd mask+0.07: 13(-2.75,-3.375) 14(-2.25,-3.375) 15(-1.75,-3.375) 16(-1.25,-3.375) 17(-0.75,-3.375) 18(-0.25,-3.375) 19(0.25,-3.375) 20(0.75,-3.375) 21(1.25,-3.375) 22(1.75,-3.375) 23(2.25,-3.375) 24(2.75,-3.375) 37(2.75,3.375) 38(2.25,3.375) 39(1.75,3.375) 40(1.25,3.375) 41(0.75,3.375) 42(0.25,3.375) 43(-0.25,3.375) 44(-0.75,3.375) 45(-1.25,3.375) 46(-1.75,3.375) 47(-2.25,3.375) 48(-2.75,3.375)
  rect 5.6x5.6 smd: 49(0,0)
  silkscreen extent -4.67,3.08 -4.43,3.33, body extent -3.56,-3.56 3.56,3.56, height 0.61
NMOS-8PowerVDFN [mm]
  rect 0.85x1.45 smd: 1(0,5.588) 2(1.27,5.588) 2(2.54,5.588) 2(3.81,5.588)
  rect 0.85x1.05 smd: 3(0,-0.112) 3(1.27,-0.112) 3(2.54,-0.112) 3(3.81,-0.112)
  rect 4.8x3.75 smd: 3(1.905,2.286)
  silkscreen extent -1.91,-0.64 -1.4,-0.13
NMOS-SOT23-3 [mm]
  rect 0.6x0.7 smd: 1(-0.95,-1) 2(0.95,-1) 3(0,1)
  body extent -1.46,-1.18 1.46,1.19, height 1.12
PWRIND-3.3U-0003 [mm]
  rect 2.9x5.4 smd: 1(-4.85,0) 2(4.85,0)
  body extent -6.4,-6.4 6.4,6.4, height 4.5
PWRIND-6.8U-0001 [mm]
  rect 2.6x8.2 smd: 1(-2.8,0) 2(2.8,0)
  body extent -4,-4 4,4, height 4
PWRIND-8.2U-0002 [mm]
  rect 2.875x12.45 smd: 1(-7.642,0) 2(7.642,0)
  body extent -8.7,-8.71 8.47,8.46, height 6.89
PWRIND-10U-0002 [mm]
  rect 4x4.5 smd: 1(-5,0) 2(5,0)
  body extent -6.85,-6.45 6.85,6.45, height 7.06
RES-0402 [mm]
  rect 0.6x0.7 smd: 1(-0.5,0) 2(0.5,0)
  body extent -0.5,-0.25 0.5,0.25, height 0.3
RES-0603 [mm]
  rect 1.15x1.1 smd: 1(-0.8,0) 2(0.8,0)
  body extent -0.8,-0.4 0.8,0.4, height 0.43
RES-1206 [mm]
  rect 1.05x1.8 smd: 1(-1.275,0) 2(1.275,0.043)
  body extent -1.6,-0.77 1.6,0.82, height 0.55
TEST-POINT-0001 [mm] "2024 miniature test point"
  round 1.3 hole 1: 1(0,0)
  body extent -1.27,-1.27 1.27,1.27, height 4.57